# Altium PCB digipot.PcbDoc
Units mm, origin at the board's own origin, x right, y up, seen from the top; angles counter-clockwise.
Board outline 152.4 x 101.6 mm, 2 copper layers (Top Layer, Bottom Layer); 48 components, 0 nets, 160 pads, 0 vias.
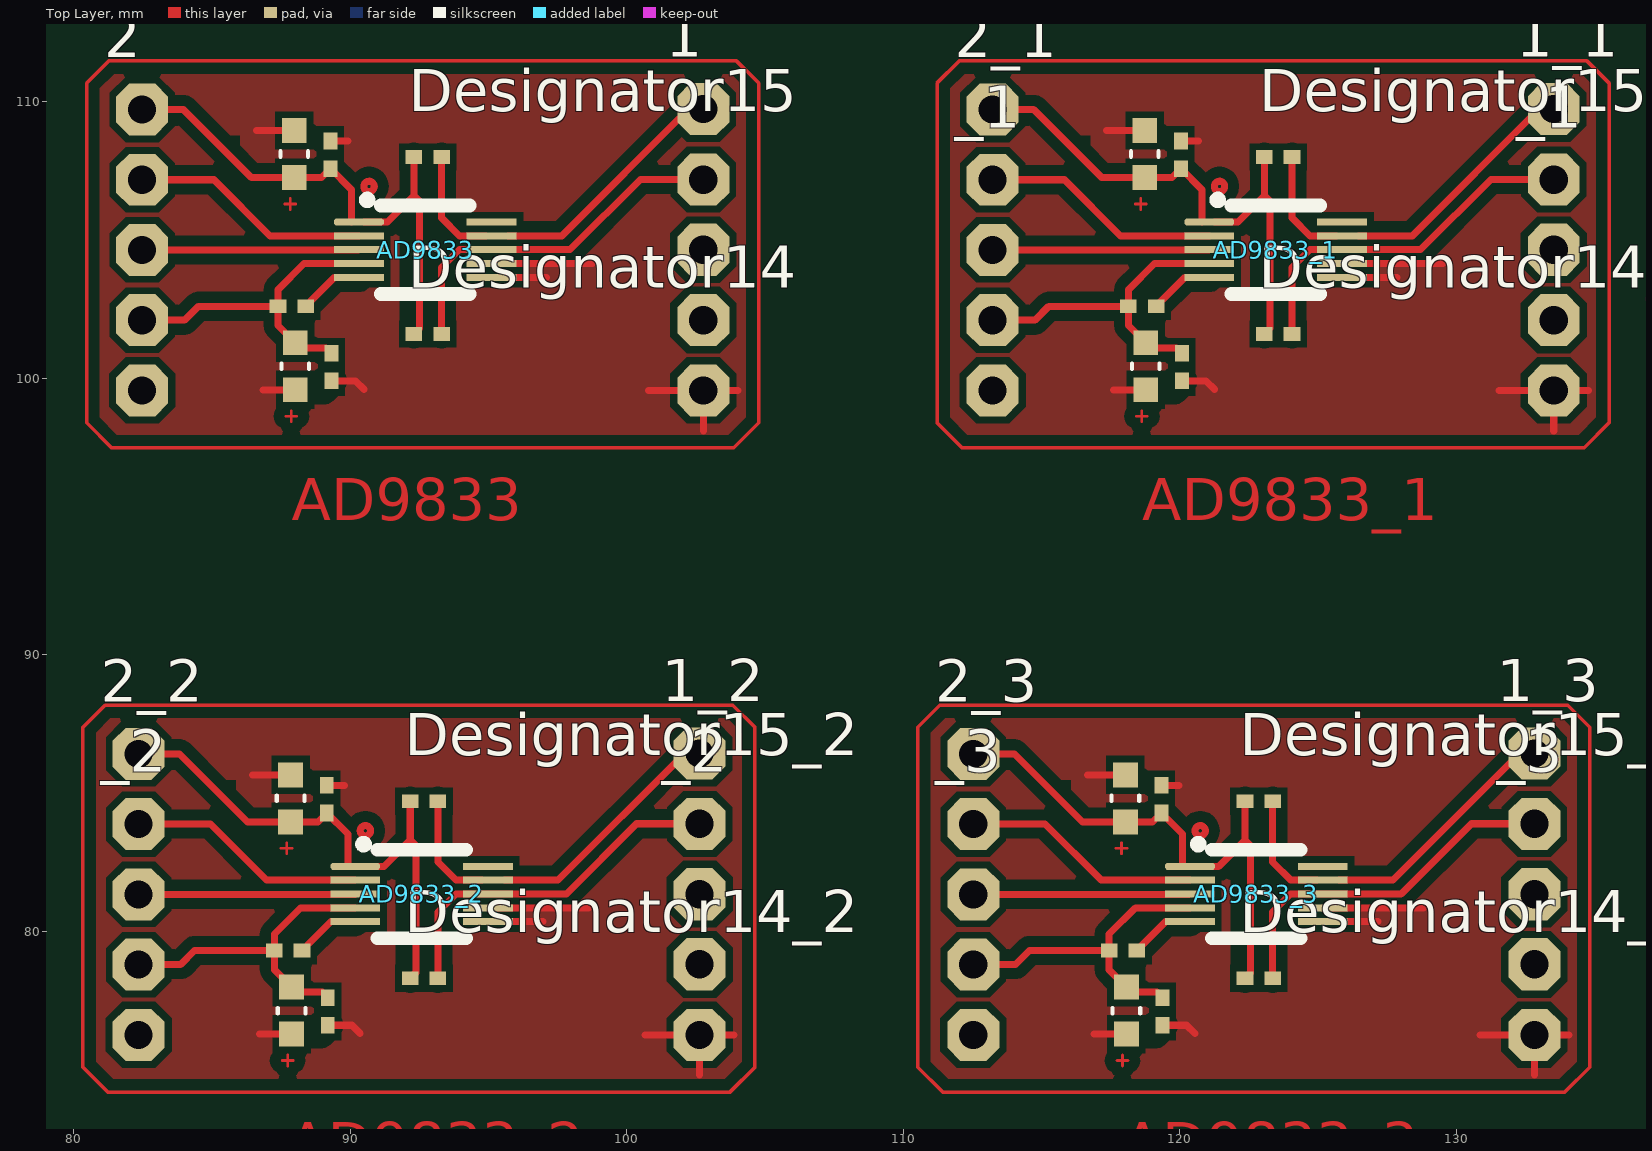
[diagram p0: Top Layer view]
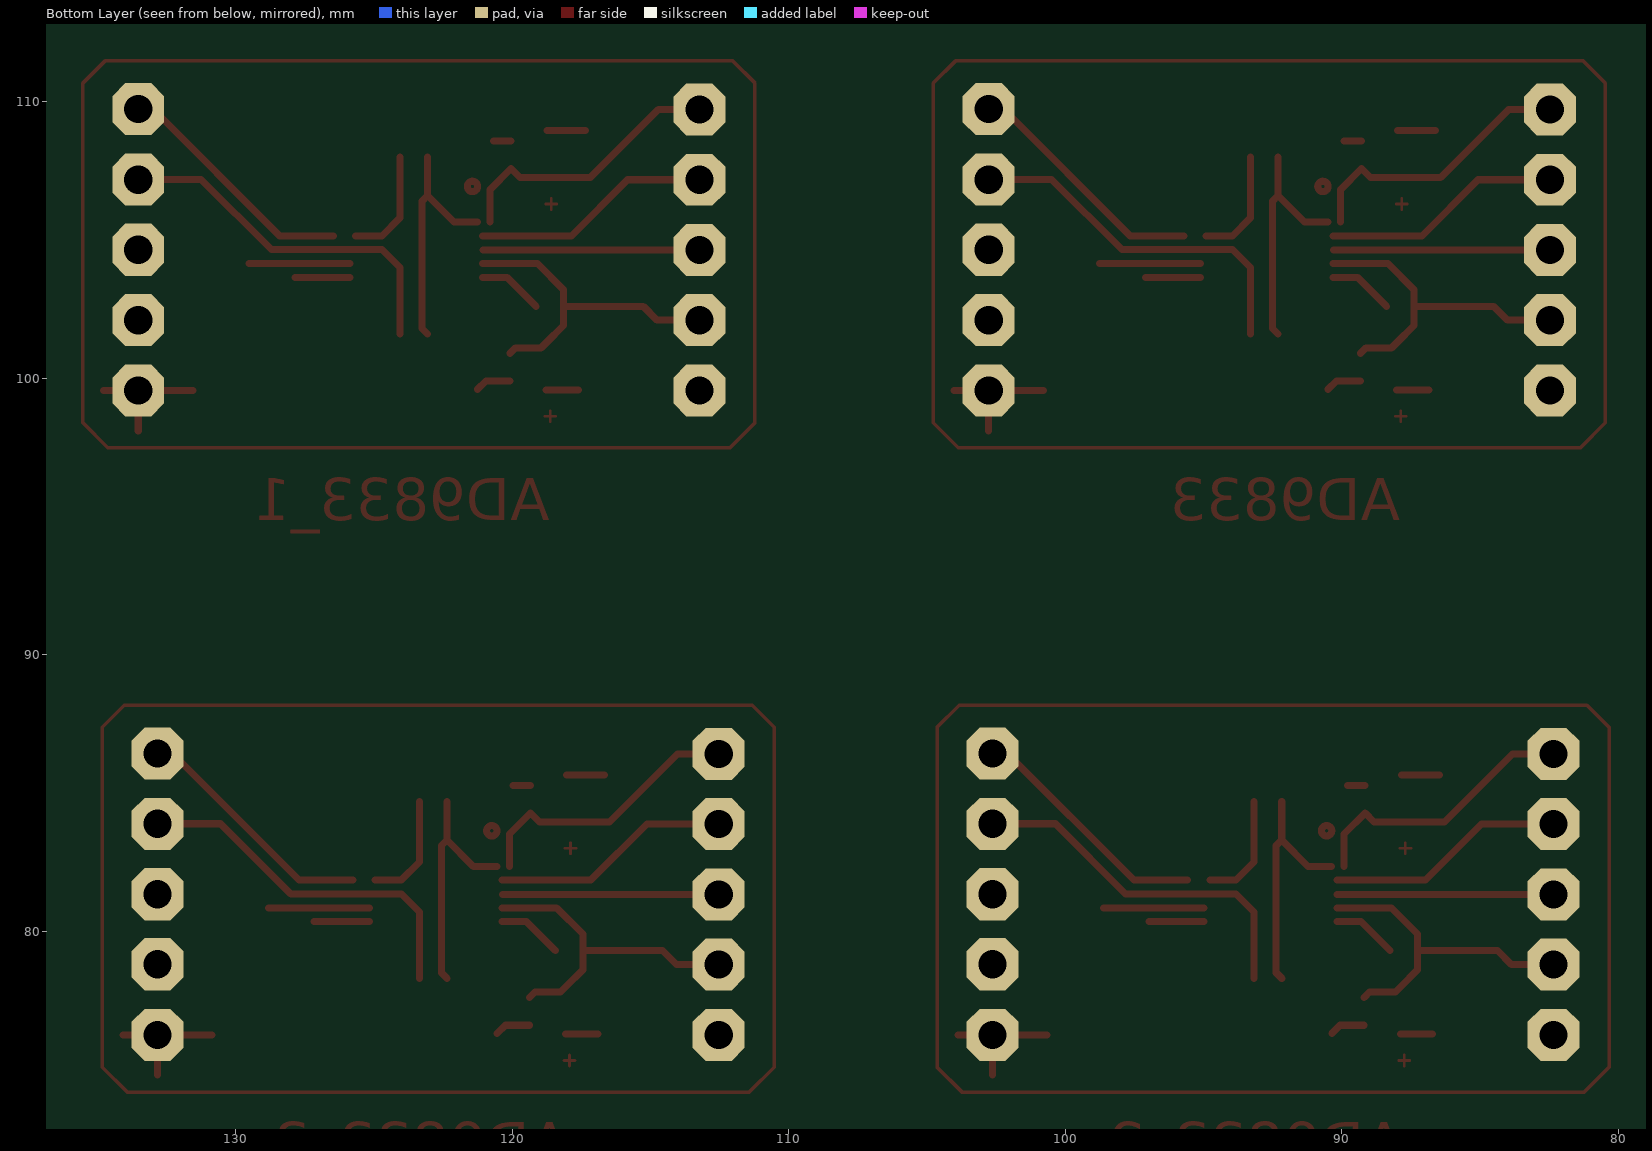
[diagram p1: Bottom Layer view, seen from below]

## Layer stack, top to bottom
Top Solder: solder mask 0.0102, Solder Resist, Dk 3.5
Top Layer: signal copper 0.0356
Dielectric 1: dielectric 0.32, FR-4, Dk 4.8
Bottom Layer: signal copper 0.0356
Bottom Solder: solder mask 0.0102, Solder Resist, Dk 3.5

## Board outline
25.4,25.4 177.8,25.4 177.8,127 25.4,127

## Design rules (kind name [scope] priority, off if disabled: settings)
Clearance test [InNamedPolygon('Top Layer-No Net')] p1: gap=0.254 ignorepadtopadclearanceinfootprint=FALSE except(0: Arc-Hole Track-Hole SMDPad-Hole THPad-Hole Via-Hole Fill-Hole Poly-Hole Region-Hole Text-Hole; 0.4: Arc-Arc Arc-Track Arc-SMDPad Arc-Fill Arc-Poly Arc-Region Track-Track Track-SMDPad Track-Fill Track-Poly Track-Region SMDPad-SMDPad Fill-Fill Fill-Poly Fill-Region Poly-Poly Poly-Region Region-Region)
Clearance Clearance_2 [InNamedPolygon('Top Layer-No Net')] p2: gap=0.254 ignorepadtopadclearanceinfootprint=FALSE except(0: Arc-Hole Track-Hole SMDPad-Hole THPad-Hole Via-Hole Fill-Hole Poly-Hole Region-Hole Text-Hole; 0.4: Arc-Arc Arc-Track Arc-SMDPad Track-Track Track-SMDPad SMDPad-SMDPad)
Clearance Clearance_1 [InNamedPolygon('Top Layer-No Net')] p3: gap=0.4 ignorepadtopadclearanceinfootprint=FALSE except(0: Arc-Hole Track-Hole SMDPad-Hole THPad-Hole Via-Hole Fill-Hole Poly-Hole Region-Hole Text-Hole)
Clearance [All] p4: gap=0.254 ignorepadtopadclearanceinfootprint=FALSE except(0: Arc-Hole Track-Hole SMDPad-Hole THPad-Hole Via-Hole Fill-Hole Poly-Hole Region-Hole Text-Hole)
PolygonConnect [All] p1: connectstyle=Relief reliefconductorwidth=0.254 reliefentries=4 polygonreliefangle="90 Angle" airgapwidth=0.254
RoutingVias [All] p1: holewidth=0.711 width=1.27 viastyle="Through Hole" minholewidth=0.711 minwidth=1.27 maxholewidth=0.711 maxwidth=1.27
SolderMaskExpansion [All] p1: expansion=0.102
Width [All] p1: maxlimit=0.254 minlimit=0.254 preferedwidth=0.254
30 further rules are at their usual default settings.

## Components (designator, comment, footprint, x,y, rotation, side; value= is the part's Value field where it differs from the comment)
1 "Comment" 1X04 102.764,102.108 r90 top
1_1 "Comment" 1X04 133.518,102.108 r90 top
1_2 "Comment" 1X04 102.632,78.808 r90 top
1_3 "Comment" 1X04 132.818,78.808 r90 top
2 "Comment" 1X04 82.474,102.096 r90 top
2_1 "Comment" 1X04 113.228,102.096 r90 top
2_2 "Comment" 1X04 82.342,78.796 r90 top
2_3 "Comment" 1X04 112.528,78.796 r90 top
_1 "Comment" 1X04 113.228,99.556 r90 top
_1 "Comment" 1X04 133.518,99.556 r90 top
_2 "Comment" 1X04 82.342,76.256 r90 top
_2 "Comment" 1X04 102.632,76.256 r90 top
_3 "Comment" 1X04 112.528,76.256 r90 top
_3 "Comment" 1X04 132.818,76.256 r90 top
AD9833 "Comment" MSOP-10_M 92.71,104.648 r270 top
AD9833_1 "Comment" MSOP-10_M 123.464,104.648 r270 top
AD9833_2 "Comment" MSOP-10_M 92.578,81.348 r270 top
AD9833_3 "Comment" MSOP-10_M 122.764,81.348 r270 top
Designator14 "Comment" 0402 92.8,101.6 r0 top
Designator14_1 "Comment" 0402 123.554,101.6 r0 top
Designator14_2 "Comment" 0402 92.668,78.3 r0 top
Designator14_3 "Comment" 0402 122.854,78.3 r0 top
Designator15 "Comment" 0402 92.8,108 r0 top
Designator15_1 "Comment" 0402 123.554,108 r0 top
Designator15_2 "Comment" 0402 92.668,84.7 r0 top
Designator15_3 "Comment" 0402 122.854,84.7 r0 top
? "Comment" 1608[0603]_M 118.028,84.806 r90 top
? "Comment" 0402 119.335,84.777 r270 top
? "Comment" 0402 119.372,77.102 r270 top
? "Comment" 1608[0603]_M 118.065,77.131 r90 top
? "Comment" 0402 117.938,79.3 r0 top
? "Comment" 1608[0603]_M 87.842,84.806 r90 top
? "Comment" 0402 89.149,84.777 r270 top
? "Comment" 0402 89.186,77.102 r270 top
? "Comment" 1608[0603]_M 87.879,77.131 r90 top
? "Comment" 0402 87.752,79.3 r0 top
? "Comment" 1608[0603]_M 118.728,108.106 r90 top
? "Comment" 0402 120.035,108.077 r270 top
? "Comment" 0402 120.072,100.402 r270 top
? "Comment" 1608[0603]_M 118.765,100.431 r90 top
? "Comment" 0402 118.638,102.6 r0 top
? "Comment" 0402 87.884,102.6 r0 top
? "Comment" 1608[0603]_M 88.011,100.431 r90 top
? "Comment" 0402 89.318,100.402 r270 top
? "Comment" 0402 89.281,108.077 r270 top
? "Comment" 1608[0603]_M 87.974,108.106 r90 top
? "Comment" 1X04 102.764,99.556 r90 top
? "Comment" 1X04 82.474,99.556 r90 top

## Footprints (in the part's own frame and the unit in brackets; to place one, negate y for a bottom-side part, rotate by r counter-clockwise, add the part's x,y. Pads: shape width x height; smd on the part's side, far side on the other; paste and mask are expansions set on the pad)
1X04 [mil]
  oct 74x74 hole 40: 1(0,0) 2(100,0) 3(200,0) 4(300,0)
0402 [mm] "Chip Capacitor, Body 1.0x0.5mm, IPC High Density"
  rect 0.6x0.5 smd: 1(-0.5,0) 2(0.5,0)
  body extent -0.55,-0.3 0.55,0.3, height 1.3
1608[0603]_M [mm] "Two Terminal Package, Body 1.6x0.8mm, IPC Low Density"
  rect 0.9x0.9 smd: 1(-0.85,0) 2(0.85,0)
  silkscreen extent -0.1,-0.5 0.1,0.5, body extent -0.8,-0.4 0.8,0.4, height 0.85
MSOP-10_M [mm] "MSOP, 10-Leads, Body 3x3x1.1mm, Pitch 0.5mm, Lead Span 4.9mm, IPC Low Density"
  oct 0.25x1.8 smd paste-0.025 mask+0.075: 1(-1,-2.4)
  rect 0.25x1.8 smd paste-0.025 mask+0.075: 2(-0.5,-2.4) 3(0,-2.4) 4(0.5,-2.4) 5(1,-2.4) 6(1,2.4) 7(0.5,2.4) 8(0,2.4) 9(-0.5,2.4) 10(-1,2.4)
  silkscreen extent -1.95,-2.25 1.6,1.6, body extent -1.5,-1.5 1.5,1.5, height 1.1

## Nets (pads, with @x,y where several pads share a name; then routed paths per layer and width w, separated by ;. In a path a pad name is that pad's centre, name@x,y a point inside that pad or via, vN(x,y) a via of type N, cw(c..) or ccw(c..) an arc to the next point about the centre after c; other vN are vias at no path point)
pads on no net: 1.1 1.2 1.3 1.4 1_1.1 1_1.2 1_1.3 1_1.4 1_2.1 1_2.2 1_2.3 1_2.4 1_3.1 1_3.2 1_3.3 1_3.4 2.1 2.2 2.3 2.4 2_1.1 2_1.2 2_1.3 2_1.4 2_2.1 2_2.2 2_2.3 2_2.4 2_3.1 2_3.2 2_3.3 2_3.4 ?.1 ?.2 ?.3 ?.4 _1.1 _1.2 _1.3 _1.4 _2.1 _2.2 _2.3 _2.4 _3.1 _3.2 _3.3 _3.4 AD9833.1 AD9833.2 AD9833.3 AD9833.4 AD9833.5 AD9833.6 AD9833.7 AD9833.8 AD9833.9 AD9833.10 AD9833_1.1 AD9833_1.2 AD9833_1.3 AD9833_1.4 AD9833_1.5 AD9833_1.6 AD9833_1.7 AD9833_1.8 AD9833_1.9 AD9833_1.10 AD9833_2.1 AD9833_2.2 AD9833_2.3 AD9833_2.4 AD9833_2.5 AD9833_2.6 AD9833_2.7 AD9833_2.8 AD9833_2.9 AD9833_2.10 AD9833_3.1 AD9833_3.2 AD9833_3.3 AD9833_3.4 AD9833_3.5 AD9833_3.6 AD9833_3.7 AD9833_3.8 AD9833_3.9 AD9833_3.10 Designator14.1 Designator14.2 Designator14_1.1 Designator14_1.2 Designator14_2.1 Designator14_2.2 Designator14_3.1 Designator14_3.2 Designator15.1 Designator15.2 Designator15_1.1 Designator15_1.2 Designator15_2.1 Designator15_2.2 Designator15_3.1 Designator15_3.2
copper on no net: | length 678.3
  Top Layer w0.1: 87.498,82.999 87.898,82.999 ; 87.535,75.324 87.935,75.324 ; 87.63,106.299 88.03,106.299 ; 87.667,98.624 88.067,98.624 ; 87.698,82.799 87.698,83.199 ; 87.735,75.124 87.735,75.524 ; 87.83,106.099 87.83,106.499 ; 87.867,98.424 87.867,98.824 ; 117.684,82.999 118.084,82.999 ; 117.721,75.324 118.121,75.324 ; 117.884,82.799 117.884,83.199 ; 117.921,75.124 117.921,75.524 ; 118.384,106.299 118.784,106.299 ; 118.421,98.624 118.821,98.624 ; 118.584,106.099 118.584,106.499 ; 118.621,98.424 118.621,98.824
  Top Layer w0.128: 80.332,75.086 81.232,74.186 103.732,74.186 104.632,75.086 104.632,87.372 103.832,88.172 81.132,88.172 80.332,87.372 80.332,75.086 ; 80.464,98.386 80.464,110.672 81.264,111.472 103.964,111.472 104.764,110.672 104.764,98.386 103.864,97.486 81.364,97.486 80.464,98.386 ; 110.518,75.086 111.418,74.186 133.918,74.186 134.818,75.086 134.818,87.372 134.018,88.172 111.318,88.172 110.518,87.372 110.518,75.086 ; 111.218,98.386 112.118,97.486 134.618,97.486 135.518,98.386 135.518,110.672 134.718,111.472 112.018,111.472 111.218,110.672 111.218,98.386
  Top Layer w0.254: 82.342,78.796 83.868,78.796 84.372,79.3 87.252,79.3 ; 82.342,81.336 90.166,81.336 ; 82.342,83.876 84.94,83.876 86.968,81.848 90.178,81.848 ; 82.342,86.416 83.827,86.416 86.287,83.956 87.842,83.956 88.828,83.956 89.149,84.277 89.911,83.515 89.911,82.348 ; 82.474,102.096 84,102.096 84.504,102.6 87.384,102.6 ; 82.474,104.636 90.298,104.636 ; 82.474,107.176 85.072,107.176 87.1,105.148 90.31,105.148 ; 82.474,109.716 83.959,109.716 86.419,107.256 87.974,107.256 88.96,107.256 89.281,107.577 90.043,106.815 90.043,105.648 ; 86.468,85.656 87.842,85.656 ; 86.6,108.956 87.974,108.956 ; 86.715,76.281 87.879,76.281 ; 86.847,99.581 88.011,99.581 ; 88.252,79.3 89.3,80.348 90.178,80.348 ; 88.384,102.6 89.432,103.648 90.31,103.648 ; 89.149,85.277 89.788,85.277 ; 89.186,76.602 90.057,76.602 90.359,76.3 ; 89.186,77.602 88.988,77.8 88.06,77.8 87.879,77.981 87.252,78.608 87.252,79.3 ; 89.281,108.577 89.92,108.577 ; 89.318,99.902 90.189,99.902 90.491,99.6 ; 89.318,100.902 89.12,101.1 88.192,101.1 88.011,101.281 87.384,101.908 87.384,102.6 ; 90.178,80.848 88.2,80.848 87.252,79.9 87.252,79.3 ; 90.31,104.148 88.332,104.148 87.384,103.2 87.384,102.6 ; 90.368,82.348 91.216,82.348 92.168,83.3 ; 90.5,105.648 91.348,105.648 92.3,106.6 ; 92.168,78.3 92.368,78.5 92.368,83.1 92.168,83.3 ; 92.168,84.7 92.168,83.3 ; 92.3,101.6 92.5,101.8 92.5,106.4 92.3,106.6 ; 92.3,108 92.3,106.6 ; 93.168,78.3 93.168,80.7 93.816,81.348 94.978,81.348 ; 93.168,84.7 93.168,82.5 93.82,81.848 94.768,81.848 ; 93.3,101.6 93.3,104 93.948,104.648 95.11,104.648 ; 93.3,108 93.3,105.8 93.952,105.148 94.9,105.148 ; 94.116,81.348 94.978,81.348 ; 94.248,104.648 95.11,104.648 ; 94.978,80.348 96.968,80.348 ; 94.978,80.848 98.619,80.848 ; 95.11,103.648 97.1,103.648 ; 95.11,104.148 98.751,104.148 ; 95.568,81.848 96.616,81.848 ; 95.7,105.148 96.748,105.148 ; 96.168,81.848 97.516,81.848 102.096,86.428 102.632,86.428 ; 96.3,105.148 97.648,105.148 102.228,109.728 102.764,109.728 ; 100.659,76.256 102.632,76.256 ; 100.791,99.556 102.764,99.556 ; 102.632,74.8 102.632,76.256 ; 102.632,83.888 100.356,83.888 97.816,81.348 94.978,81.348 ; 102.764,98.1 102.764,99.556 ; 102.764,107.188 100.488,107.188 97.948,104.648 95.11,104.648 ; 103.882,76.256 102.632,76.256 ; 104.014,99.556 102.764,99.556 ; 112.528,78.796 114.054,78.796 114.558,79.3 117.438,79.3 ; 112.528,81.336 120.352,81.336 ; 112.528,83.876 115.126,83.876 117.154,81.848 120.364,81.848 ; 112.528,86.416 114.013,86.416 116.473,83.956 118.028,83.956 119.014,83.956 119.335,84.277 120.097,83.515 120.097,82.348 ; 113.228,102.096 114.754,102.096 115.258,102.6 118.138,102.6 ; 113.228,104.636 121.052,104.636 ; 113.228,107.176 115.826,107.176 117.854,105.148 121.064,105.148 ; 113.228,109.716 114.713,109.716 117.173,107.256 118.728,107.256 119.714,107.256 120.035,107.577 120.797,106.815 120.797,105.648 ; 116.654,85.656 118.028,85.656 ; 116.901,76.281 118.065,76.281 ; 117.354,108.956 118.728,108.956 ; 117.601,99.581 118.765,99.581 ; 118.438,79.3 119.486,80.348 120.364,80.348 ; 119.138,102.6 120.186,103.648 121.064,103.648 ; 119.335,85.277 119.974,85.277 ; 119.372,76.602 120.243,76.602 120.545,76.3 ; 119.372,77.602 119.174,77.8 118.246,77.8 118.065,77.981 117.438,78.608 117.438,79.3 ; 120.035,108.577 120.674,108.577 ; 120.072,99.902 120.943,99.902 121.245,99.6 ; 120.072,100.902 119.874,101.1 118.946,101.1 118.765,101.281 118.138,101.908 118.138,102.6 ; 120.364,80.848 118.386,80.848 117.438,79.9 117.438,79.3 ; 120.554,82.348 121.402,82.348 122.354,83.3 ; 121.064,104.148 119.086,104.148 118.138,103.2 118.138,102.6 ; 121.254,105.648 122.102,105.648 123.054,106.6 ; 122.354,78.3 122.554,78.5 122.554,83.1 122.354,83.3 ; 122.354,84.7 122.354,83.3 ; 123.054,101.6 123.254,101.8 123.254,106.4 123.054,106.6 ; 123.054,108 123.054,106.6 ; 123.354,78.3 123.354,80.7 124.002,81.348 125.164,81.348 ; 123.354,84.7 123.354,82.5 124.006,81.848 124.954,81.848 ; 124.054,101.6 124.054,104 124.702,104.648 125.864,104.648 ; 124.054,108 124.054,105.8 124.706,105.148 125.654,105.148 ; 124.302,81.348 125.164,81.348 ; 125.002,104.648 125.864,104.648 ; 125.164,80.348 127.154,80.348 ; 125.164,80.848 128.805,80.848 ; 125.754,81.848 126.802,81.848 ; 125.864,103.648 127.854,103.648 ; 125.864,104.148 129.505,104.148 ; 126.354,81.848 127.702,81.848 132.282,86.428 132.818,86.428 ; 126.454,105.148 127.502,105.148 ; 127.054,105.148 128.402,105.148 132.982,109.728 133.518,109.728 ; 130.845,76.256 132.818,76.256 ; 131.545,99.556 133.518,99.556 ; 132.818,74.8 132.818,76.256 ; 132.818,83.888 130.542,83.888 128.002,81.348 125.164,81.348 ; 133.518,98.1 133.518,99.556 ; 133.518,107.188 131.242,107.188 128.702,104.648 125.864,104.648 ; 134.068,76.256 132.818,76.256 ; 134.768,99.556 133.518,99.556 ; 90.734,83.634 ccw(c90.546,83.634) 90.734,83.634 ; 90.866,106.934 ccw(c90.678,106.934) 90.866,106.934 ; 120.92,83.634 ccw(c120.732,83.634) 120.92,83.634 ; 121.62,106.934 ccw(c121.432,106.934) 121.62,106.934

## Polygon pours and split planes (outlines as drawn)
no net on Top Layer "Top Layer-No Net" (solid, pour order 10): 110.747,75.181 111.499,74.429 133.837,74.429 134.525,75.117 134.525,87.341 133.923,87.943 111.413,87.943 110.808,87.338 110.747,87.295
no net on Top Layer "Top Layer-No Net" (solid, pour order 8): 80.561,75.181 81.313,74.429 103.651,74.429 104.339,75.117 104.339,87.341 103.737,87.943 81.227,87.943 80.622,87.338 80.561,87.295
no net on Top Layer "Top Layer-No Net" (solid, pour order 6): 111.447,98.481 112.199,97.729 134.537,97.729 135.225,98.417 135.225,110.641 134.623,111.243 112.113,111.243 111.508,110.638 111.447,110.595
no net on Top Layer "Top Layer-No Net" (solid, pour order 4): 80.693,98.481 81.445,97.729 103.783,97.729 104.471,98.417 104.471,110.641 103.869,111.243 81.359,111.243 80.754,110.638 80.693,110.595